# Altium PCB MPLAB-ICD-Inline.PcbDoc
Units mm, origin at the board's own origin, x right, y up, seen from the top; angles counter-clockwise.
Board outline 43 x 29 mm, 2 copper layers (Top Layer, Bottom Layer); 6 components, 6 nets, 28 pads, 0 vias.
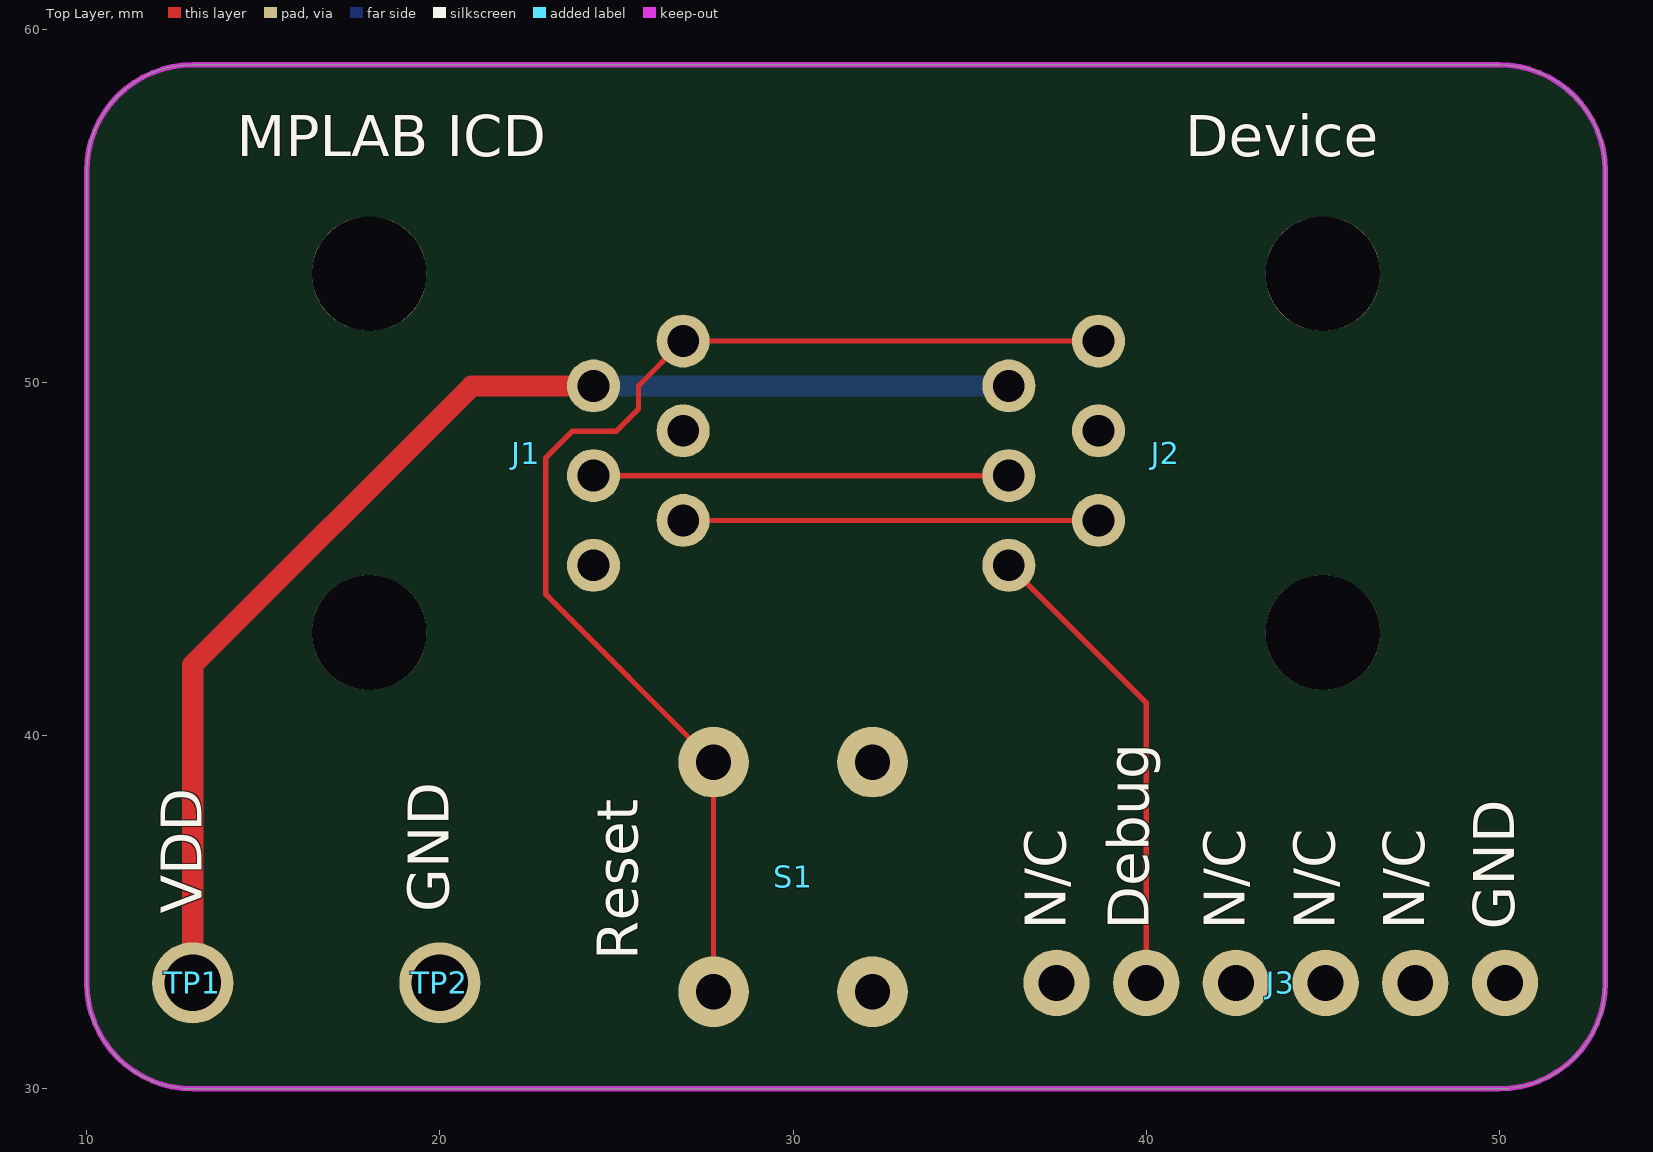
[diagram p0: Top Layer view]
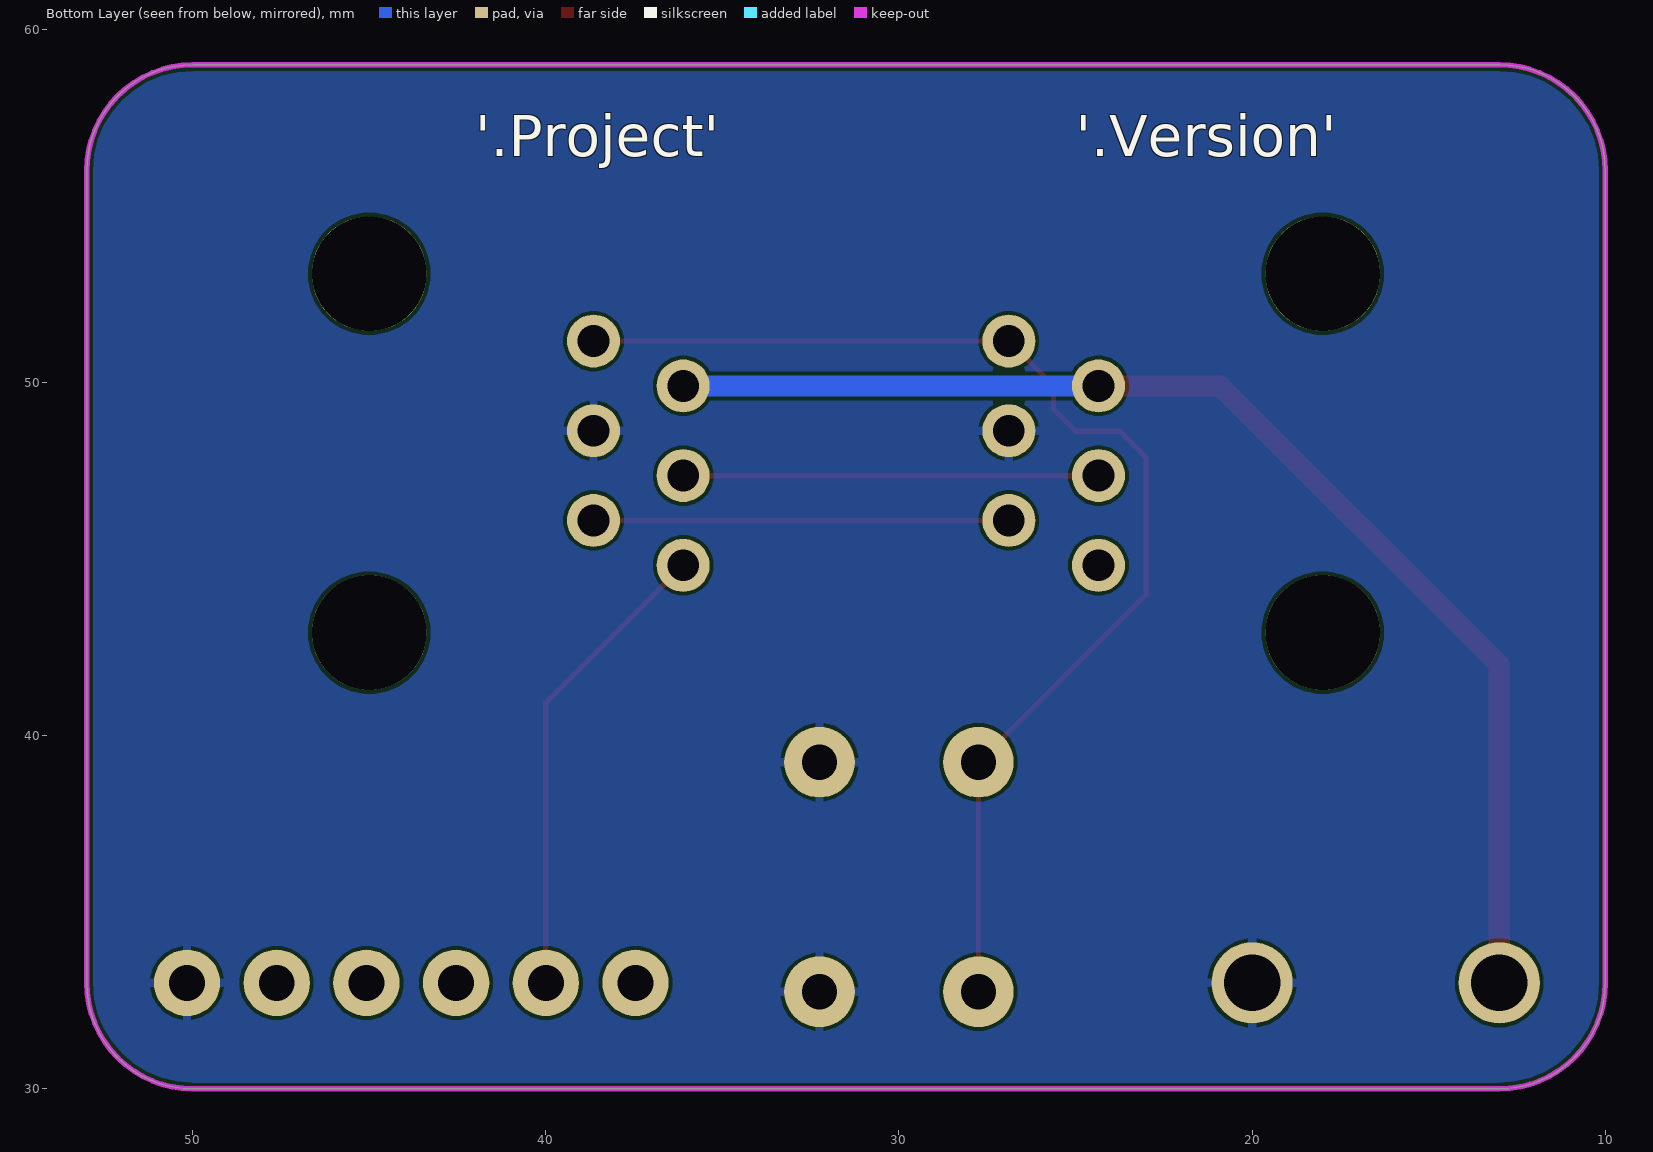
[diagram p1: Bottom Layer view, seen from below]

## Layer stack, top to bottom
Top Solder: solder mask 0.0102, Solder Resist, Dk 3.5
Top Layer: signal copper 0.0356
Dielectric 1: dielectric 0.32, FR-4, Dk 4.8
Bottom Layer: signal copper 0.0356
Bottom Solder: solder mask 0.0102, Solder Resist, Dk 3.5

## Board outline
10,33 10,56 cw(c13,56) 13,59 50,59 cw(c50,56) 53,56 53,33 cw(c50,33) 50,30 13,30 cw(c13,33)

## Design rules (kind name [scope] priority, off if disabled: settings)
Clearance [All] p1: gap=0.1 ignorepadtopadclearanceinfootprint=FALSE except(0: Arc-Hole Track-Hole SMDPad-Hole THPad-Hole Via-Hole Fill-Hole Poly-Hole Region-Hole Text-Hole)
DiffPairsRouting [All] p1: maxlimit=0.254 minlimit=0.1 mostfreqgap=0.1 toplayer_minwidth=0.1 toplayer_maxwidth=0.381 toplayer_prefwidth=0.1 bottomlayer_minwidth=0.1 bottomlayer_maxwidth=0.381 bottomlayer_prefwidth=0.1 maxuncoupledlength=12.7
HoleSize [All] p1: absolutevalues=TRUE maxlimit=10 minlimit=0.025 maxpercent=80.000 minpercent=20.000
MinimumSolderMaskSliver [All] p1: minsoldermaskwidth=0
PlaneClearance [All] p1: clearance=0.2
PlaneConnect [All] p1: planeconnectstyle=Direct reliefexpansion=0.508 reliefentries=4 reliefconductorwidth=0.254 reliefairgap=0.254
PolygonConnect [All] p1: thpad.connectstyle=Relief thpad.reliefconductorwidth=0.254 thpad.reliefentries=4 thpad.polygonreliefangle="90 Angle" thpad.airgapwidth=0.1 smdpad.connectstyle=Relief smdpad.reliefconductorwidth=0.254 smdpad.reliefentries=4 smdpad.polygonreliefangle="90 Angle" smdpad.airgapwidth=0.1 via.connectstyle=Direct via.reliefconductorwidth=0.254 via.reliefentries=4 via.polygonreliefangle="90 Angle" via.airgapwidth=0.254
RoutingVias [All] p1: holewidth=0.711 width=1.27 viastyle="Through Hole" minholewidth=0.2 minwidth=0.4 maxholewidth=0.711 maxwidth=1.27
SilkToSolderMaskClearance [IsPad] p1: minsilkscreentomaskgap=0.1 clearancetoexposedcopper=TRUE
SolderMaskExpansion [All] p1: expansion=0.102 istentingtop=FALSE
Width [All] p1: maxlimit=1 minlimit=0.1 preferedwidth=0.1
24 further rules are at their usual default settings.

## Components (designator, comment, footprint, x,y, rotation, side; value= is the part's Value field where it differs from the comment)
J1 "Molex 95501-2661" "MOLEX 95501-2661" 18,48 r270 top
J2 "Molex 95501-2661" "MOLEX 95501-2661" 45,48 r90 top
J3 "Molex 90121-0766" "Molex 90121-0766 with FTDI Breakout" 43.81,33 r270 top
S1 "FSM4JHX" FSM4JHX 30,36 r270 top
TP1 "Keystone 5010" "Keystone 5010" 13,33 r0 top
TP2 "Keystone 5011" "Keystone 5011" 20,33 r0 top

## Footprints (in the part's own frame and the unit in brackets; to place one, negate y for a bottom-side part, rotate by r counter-clockwise, add the part's x,y. Pads: shape width x height; smd on the part's side, far side on the other; paste and mask are expansions set on the pad)
FSM4JHX [mm]
  round 2 hole 1: 1(-3.25,2.25) 1(3.25,2.25) 2(-3.25,-2.25) 2(3.25,-2.25)
  body extent -3.9,-2.99 3.9,3, height 5
"Keystone 5010" [mm]
  round 2.3 hole 1.6: 1(0,0)
  body extent -1.59,-1.59 1.59,1.59, height 8.13
"Keystone 5011" [mm]
  round 2.3 hole 1.6: 1(0,0)
  body extent -1.59,-1.59 1.59,1.59, height 8.13
"Molex 90121-0766 with FTDI Breakout" [mil]
  round 74 hole 40: 1(0,250) 2(0,150) 3(0,50) 4(0,-50) 5(0,-150) 6(0,-250)
  body extent -15,-353 1097,351, height 318
"MOLEX 95501-2661" [mm]
  round 1.5 hole 0.9: 1(-3.175,8.89) 2(-1.905,6.35) 3(-0.635,8.89) 4(0.635,6.35) 5(1.905,8.89) 6(3.175,6.35)
  round 3.25 hole 3.25 unplated: "Mounting Hole"(-5.08,0) "Mounting Hole"(5.08,0)
  body extent -6.6,-7.94 6.6,10.16, height 11.59

## Part data
J1: library part "MPLAB ICSP"
J3: library part "FTDI Breakout"
S1: library part Switch
TP1 TP2: library part "Test Point"

## Nets (pads, with @x,y where several pads share a name; then routed paths per layer and width w, separated by ;. In a path a pad name is that pad's centre, name@x,y a point inside that pad or via, vN(x,y) a via of type N, cw(c..) or ccw(c..) an arc to the next point about the centre after c; other vN are vias at no path point)
Debug: J2.1 J3.5 | length 13.4
  Top Layer w0.15: J2.1 40,40.935 J3.5
GND: J1.3 J2.4 J3.1 S1.1 TP2.1
MCLR/VPP: J1.1 J2.6 S1.2 | length 34.5
  Top Layer w0.15: S1.2@27.75,32.75 27.75,39.25 23,44 23,47.875 23.75,48.625 25,48.625 25.625,49.25 25.625,49.91 J1.1 J2.6
PGC: J1.5 J2.2 | length 11.8
  Top Layer w0.15: J1.5 J2.2
PGD: J1.4 J2.3 | length 11.8
  Top Layer w0.15: J1.4 J2.3
VDD: J1.2 J2.5 TP1.1 | length 35.5
  Top Layer w0.6: TP1.1 13,42 20.905,49.905 J1.2
  Top Layer w1: J1.2@24.255,50 J1.2
  Bottom Layer w0.6: J1.2 J2.5
pads on no net: "J1.Mounting Hole" "J2.Mounting Hole" J1.6 J3.2 J3.3 J3.4 J3.6

## Polygon pours and split planes (outlines as drawn)
GND on Bottom Layer "NONET_L-01_P-001" (solid, remove dead copper, pour order 0): 10,30 10,59 53,59 53,30

## Keep-outs
Keep-Out Layer:
  the board outline again, w0.15

## Silkscreen, mask and mechanical layers (free items; w line width, h text height)
Top Overlay:
  text "MPLAB ICD" at 14.254,56.022 h2
  text "Device" at 41.109,56.021 h2
  text "GND" at 20.639,35 h2 r90
  text "VDD" at 13.64,34.965 h2 r90
  text "N/C" at 38.099,34.5 h2 r90
  text "Debug" at 40.452,34.5 h2 r90
  text "N/C" at 43.179,34.5 h2 r90
  text "N/C" at 45.719,34.5 h2 r90
  text "N/C" at 48.259,34.5 h2 r90
  text "GND" at 50.799,34.5 h2 r90
  text "Reset" at 25.979,33.643 h2 r90
Bottom Overlay:
  text "'.Version'" at 25,56.022 h2
  text "'.Project'" at 42,56.022 h2